# Altium PCB USB_Hub_V2.PcbDoc
Units mil, origin at the board's own origin, x right, y up, seen from the top; angles counter-clockwise.
Board outline 2638 x 2204.72 mil, 2 copper layers (Top Layer, Bottom Layer); 20 components, 19 nets, 83 pads, 99 vias.
Unrouted connection lines stored in the file: 2.
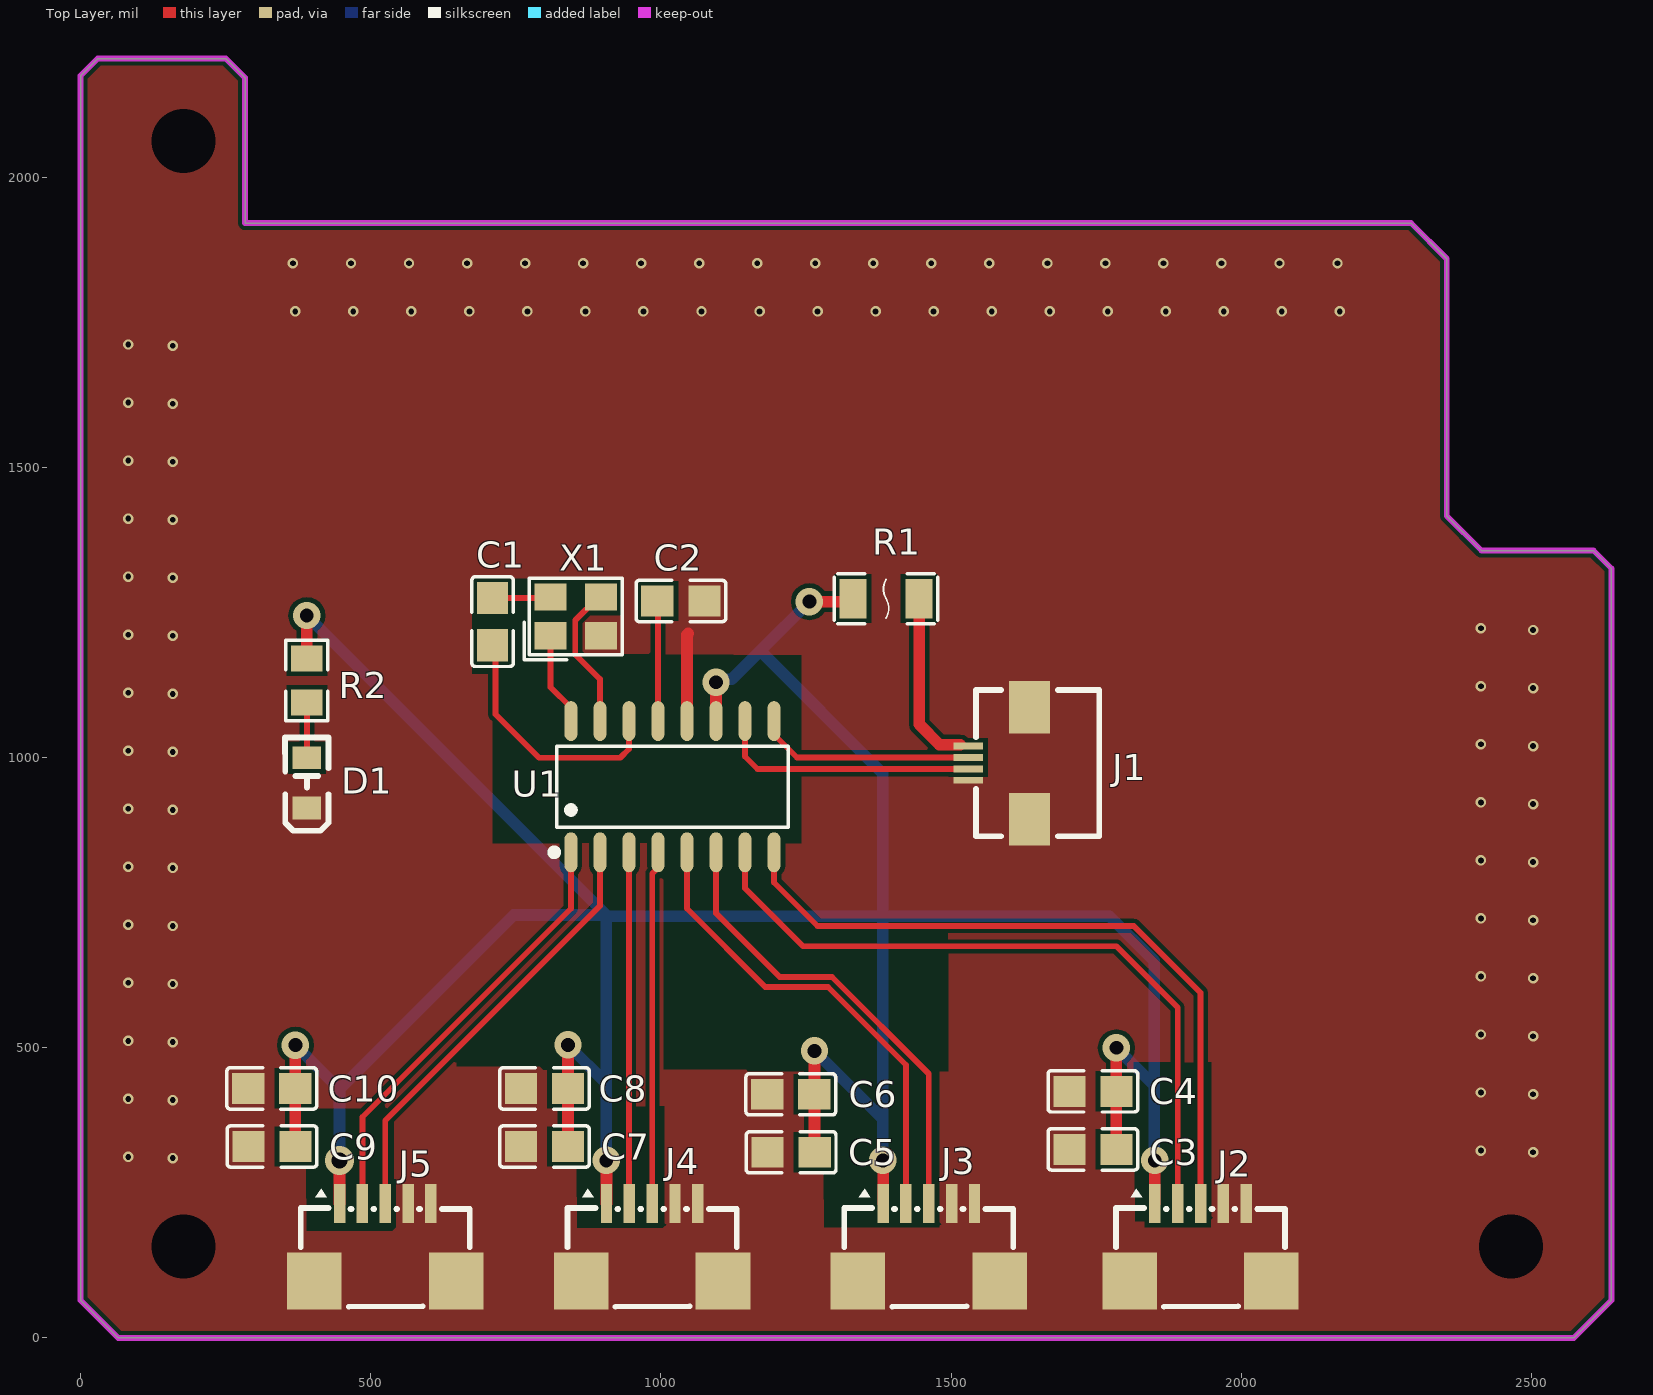
[diagram p0: Top Layer view]
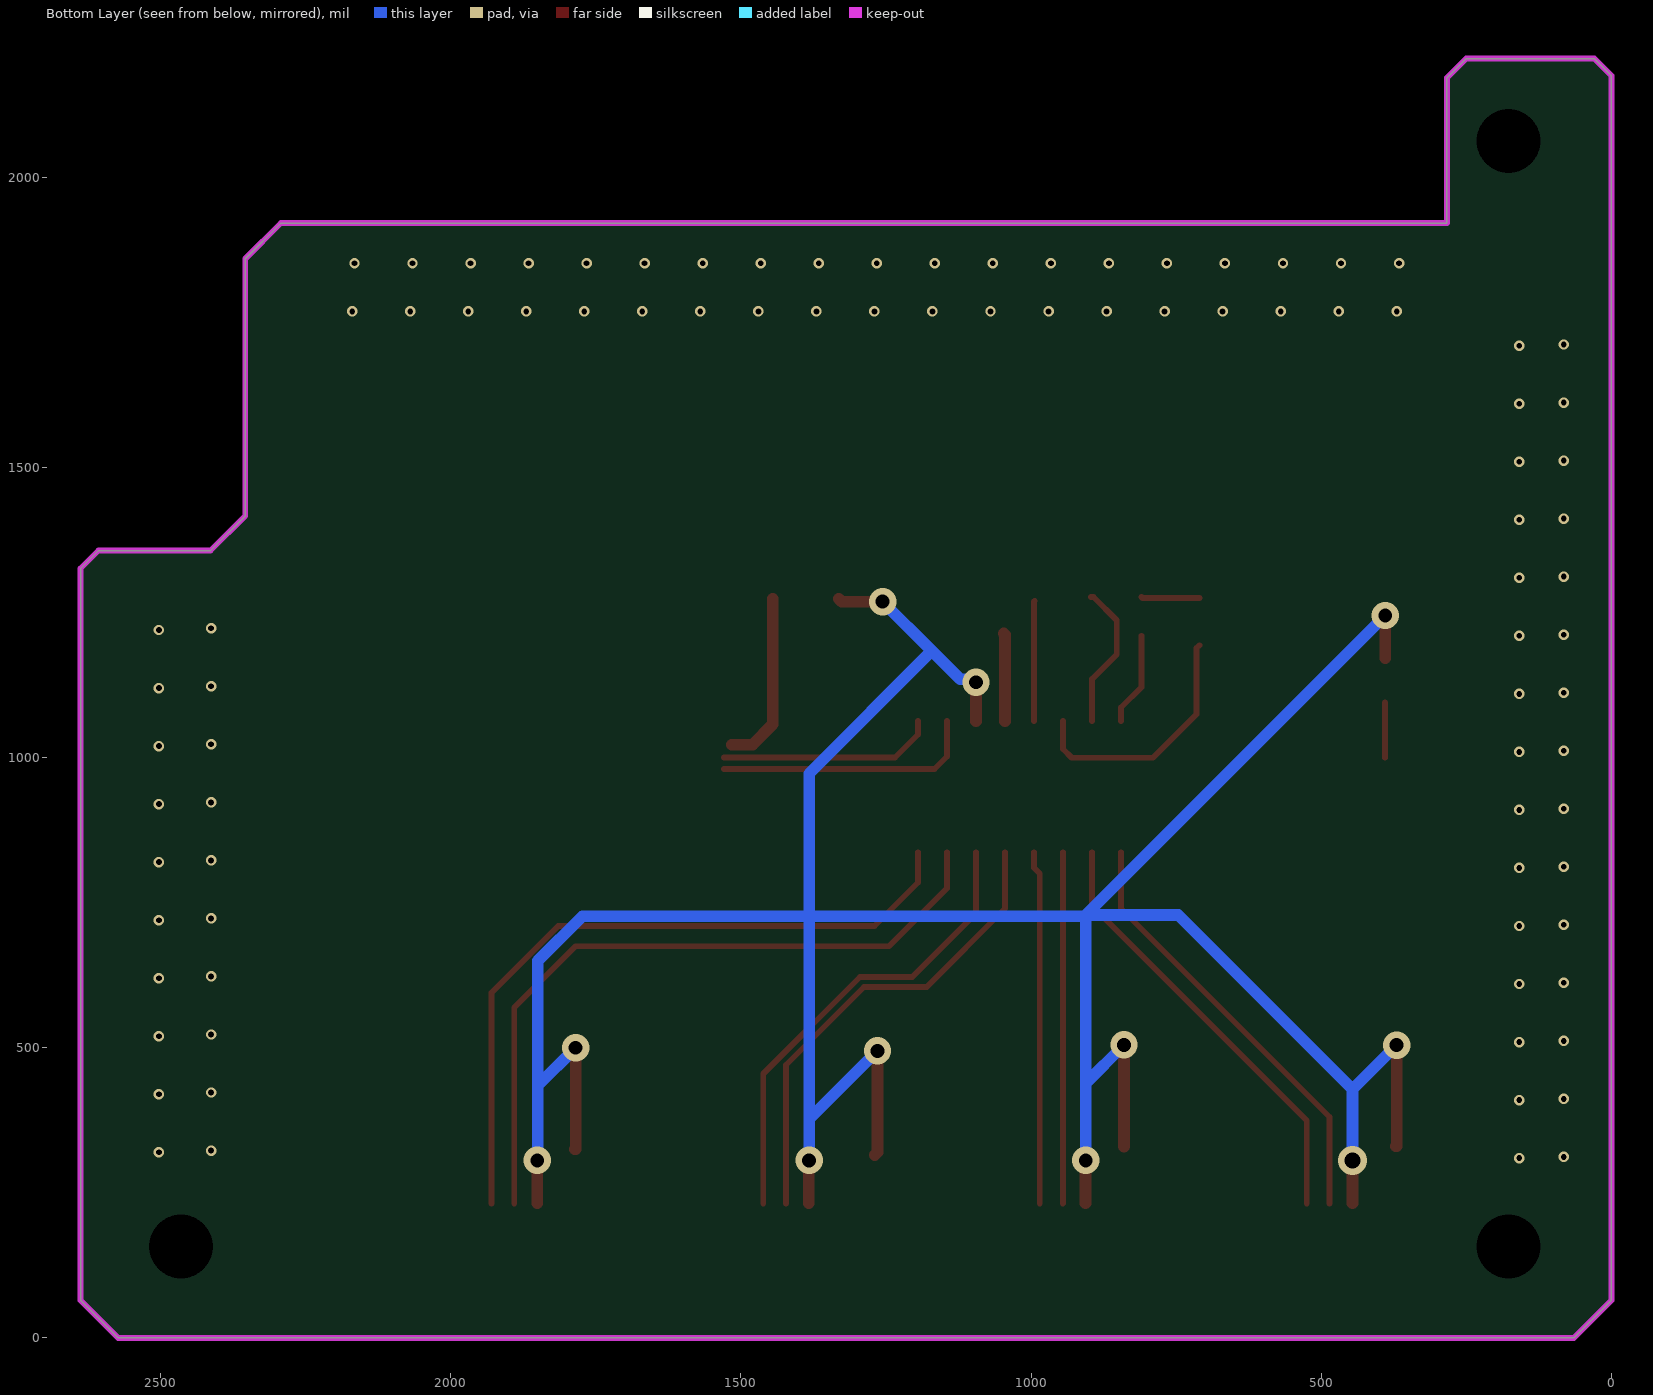
[diagram p1: Bottom Layer view, seen from below]

## Layer stack, top to bottom
Top Solder: solder mask 0.4, Solder Resist, Dk 3.5
Top Layer: signal copper 1.4
Dielectric 1: dielectric 12.6, FR-4, Dk 4.8
Bottom Layer: signal copper 1.4
Bottom Solder: solder mask 0.4, Solder Resist, Dk 3.5

## Board outline
0,65 0,2175 29.72,2204.72 250.28,2204.72 283.46,2171.54 283.46,1921.26 2292.74,1921.26 2354.33,1859.67 2354.33,1416.67 2414,1357 2607,1357 2638,1326 2638,64.89 2637.8,64.69 2573.11,0 65,0

## Design rules (kind name [scope] priority, off if disabled: settings)
Clearance [All] p1: gap=7.87 ignorepadtopadclearanceinfootprint=FALSE except(0: Arc-Hole Track-Hole SMDPad-Hole THPad-Hole Via-Hole Fill-Hole Poly-Hole Region-Hole Text-Hole; 3.94: Arc-SMDPad Track-SMDPad SMDPad-SMDPad; 7.09: Arc-Arc Arc-Track Arc-THPad Arc-Via Arc-Fill Arc-Poly Arc-Region Arc-Text Track-Track Track-THPad Track-Via Track-Fill Track-Poly Track-Region Track-Text; 19.68: THPad-Via Via-Via)
HoleSize [All] p1: absolutevalues=TRUE maxlimit=125.98 minlimit=1 maxpercent=80.000 minpercent=20.000
HoleToHoleClearance [All] p1: gap=12 allowstackedmicrovias=TRUE
MinimumSolderMaskSliver [All] p1: minsoldermaskwidth=2
PasteMaskExpansion [All] p1: expansion=1.97
PlaneClearance [All] p1: clearance=10
PlaneConnect [All] p1: planeconnectstyle=Direct reliefexpansion=20 reliefentries=4 reliefconductorwidth=10 reliefairgap=10
PolygonConnect [All] p1: connectstyle=Direct reliefconductorwidth=10 reliefentries=4 polygonreliefangle="90 Angle" airgapwidth=10
RoutingVias [All] p1: holewidth=11.81 width=15.75 viastyle="Through Hole" minholewidth=11.81 minwidth=15.75 maxholewidth=11.81 maxwidth=15.75
SilkToSilkClearance [All] p1: silktosilkclearance=1
SilkToSolderMaskClearance [IsPad] p1: minsilkscreentomaskgap=2 clearancetoexposedcopper=TRUE
SolderMaskExpansion [All] p1: expansion=3.94 istentingtop=FALSE
UnRoutedNet [All] p1: checkbadconnections=TRUE
Width PWR_idth [InNetClass('PWR')] p1: maxlimit=20 minlimit=12 preferedwidth=20 minimp=50.000000 maximp=50.000000 favimp=50.000000
Width [All] p2: maxlimit=10 minlimit=10 preferedwidth=10
21 further rules are at their usual default settings.

## Classes and differential pairs
net class PWR: GND "VBUS 5V" "VCC 5V"

## Components (designator, comment, footprint, x,y, rotation, side; value= is the part's Value field where it differs from the comment)
C1 "CAP0805" C0805 710,1234.45 r90 top locked
C2 "CAP0805" C0805 1034.45,1270 r0 top locked
C3 "CAP0805" C0805 1744.45,325 r0 top locked
C4 "CAP0805" C0805 1744.45,425 r0 top locked
C5 "CAP0805" C0805 1224.45,320 r0 top locked
C6 "CAP0805" C0805 1223.9,420 r0 top locked
C7 "CAP0805" C0805 799.45,330 r0 top locked
C8 "CAP0805" C0805 799.45,430 r0 top locked
C9 "CAP0805" C0805 330,330 r0 top locked
C10 "CAP0805" C0805 329.45,430 r0 top locked
D1 "LED0805-RD" LED0805-RD 390,956.69 r90 top locked
J1 "AFC01-S04FCC-00" FFC-SMD_4P-P0.50_AFC01-S04FCC-00 1582.24,990.55 r90 top
J2 "WAFER-SH1.0-5PWB" CONN-SMD_5P-P1.00_XUNPU_WAFER-SH1.0-5PWB 1930,165 r0 top locked
J3 "WAFER-SH1.0-5PWB" CONN-SMD_5P-P1.00_XUNPU_WAFER-SH1.0-5PWB 1461.67,165 r0 top locked
J4 "WAFER-SH1.0-5PWB" CONN-SMD_5P-P1.00_XUNPU_WAFER-SH1.0-5PWB 985,165 r0 top locked
J5 "WAFER-SH1.0-5PWB" CONN-SMD_5P-P1.00_XUNPU_WAFER-SH1.0-5PWB 525,165 r0 top locked
R1 "TLC F1206" F1206 1388.1,1274 r180 top
R2 "RES0805" R0805 390,1133.04 r90 top locked
U1 "SL2.1A" SOP-16_L10.0-W3.9-P1.27-LS6.0-BL 1020,950 r0 top locked
X1 "OSC CRYSTAL-SMD_4P-L3.2-W2.5-BL" CRYSTAL-SMD_4P-L3.2-W2.5-BL 853.31,1243.46 r0 top locked

## Footprints (in the part's own frame and the unit in brackets; to place one, negate y for a bottom-side part, rotate by r counter-clockwise, add the part's x,y. Pads: shape width x height; smd on the part's side, far side on the other; paste and mask are expansions set on the pad)
C0805 [mm]
  rect 1.41x1.35 smd paste-100 mask+0.051: 1(-1.03,0) 2(1.03,0)
  silkscreen extent -1.96,-0.9 1.96,0.9
CONN-SMD_5P-P1.00_XUNPU_WAFER-SH1.0-5PWB [mm]
  rect 0.5x1.7 smd paste+0 mask+0.05: 1(-2,1.7) 2(-1,1.7) 3(0,1.7) 4(1,1.7) 5(2,1.7)
  rect 2.388x2.5 smd paste+0 mask+0.05: 6(3.1,-1.7) 7(-3.1,-1.7)
  silkscreen extent -3.7,-2.82 3.7,2.34
CRYSTAL-SMD_4P-L3.2-W2.5-BL [mm]
  rect 1.4x1.2 smd paste+0 mask+0.051: 1(-1.1,-0.85) 2(1.1,-0.85) 3(1.1,0.85) 4(-1.1,0.85)
  silkscreen extent -2.26,-1.91 2.03,1.68
F1206 [mil]
  rect 46.9x68 smd paste+0 mask+2: 1(-56.9,0) 2(56.9,0)
  silkscreen extent -89,-43 89,43
FFC-SMD_4P-P0.50_AFC01-S04FCC-00 [mm]
  rect 0.3x1.3 smd paste+0 mask+0.05: 1(-0.75,1.34) 2(-0.25,1.34) 3(0.25,1.34) 4(0.75,1.34)
  rect 2.3x1.8 smd: 5(2.45,-1.34) 6(-2.45,-1.34)
  silkscreen extent -3.2,-4.4 3.2,1
LED0805-RD [mm]
  rect 1x1.25 smd paste+0 mask+0.051: 1(-1.1,0) 2(1.1,0)
  silkscreen extent -2.1,-0.95 1.98,0.96
R0805 [mil]
  rect 44.59x54.21 smd paste-3937.01 mask+2: 1(-38.04,0) 2(38.04,0)
  silkscreen extent -69,-36 69,36
SOP-16_L10.0-W3.9-P1.27-LS6.0-BL [mm]
  oval 0.56x1.745 smd paste+0 mask+0.051: 1(-4.445,-2.872) 2(-3.175,-2.872) 3(-1.905,-2.872) 4(-0.635,-2.872) 5(0.635,-2.872) 6(1.905,-2.872) 7(3.175,-2.872) 8(4.445,-2.872) 9(4.445,2.872) 10(3.175,2.872) 11(1.905,2.872) 12(0.635,2.872) 13(-0.635,2.872) 14(-1.905,2.872) 15(-3.175,2.872) 16(-4.445,2.872)
  silkscreen extent -5.33,-3.02 5.08,1.77

## Part data
C1 C2 C3 C4 C5 C6 C7 C8 C9 C10: "0805贴片电容", JLCPCB Part Class="Extended Part", LCSC Part Name="100nF ±10% 50V", Manufacturer=SAMSUNG(三星), Manufacturer Part=CL21B104KBCNNNC, Temperature Coefficient=X7R, Tolerance=±10%, Voltage Rated=50V, Add into BOM=yes, Convert to PCB=yes, Datasheet=https://atta.szlcsc.com/upload/public/pdf/source/20160103/1457707693305.pdf, Device=CL21B104KBCNNNC, Supplier=LCSC, Supplier Footprint=0805, Supplier Part=C1711, Symbol=CL21B104KBCNNNC
D1: "蓝光LED", Color Temperature=-, Forward Current=20mA, Forward Voltage (VF)=3.3V, JLCPCB Part Class="Extended Part", LCSC Part Name=LED贴片0805超高亮蓝光, Lens Color=无色透明, Manufacturer=MEIHUA(美华科技), Manufacturer Part=MHT170UBCT, Operating Temperature=-40~+85, Power Dissipation=95mW, Add into BOM=yes, Convert to PCB=yes, Datasheet=https://atta.szlcsc.com/upload/public/pdf/source/20190515/C389525_9DDE5770D44EFFE682D3E1E38A61D6F4.pdf, Device=MHT170UBCT, Diode Configuration=-, Dominant Wavelength=460nm~475nm, Luminous Flux (@25℃)=-, Luminous Intensity=225mcd, Mounting Sytle=-, Peak Wavelength=468nm, Supplier=LCSC, Supplier Footprint=0805, Supplier Part=C389525, Symbol=MHT170UBCT, Viewing Angle=140°
J1: library part "FPC AFC01-S04FCC-00", "4pin FPC接口", JLCPCB Part Class="Extended Part", LCSC Part Name="间距:0.5mm P数:4P 翻盖式 下接", Manufacturer=JS(钜硕电子), Add into BOM=yes, Contact Type=下接, Convert to PCB=yes, Datasheet=https://atta.szlcsc.com/upload/public/pdf/source/20190816/C413942_2A72D1AC756EAE17EEDF756A339D4500.pdf, Device=AFC01-S04FCC-00, FFC, FCB Thickness=0.3mm, Height Above Board=2mm, Locking Feature=翻盖式, Manufacturer Part=AFC01-S04FCC-00, Mounting Type=卧贴, Number of Contacts=4P, Pitch=0.5mm, Supplier=LCSC, Supplier Footprint=SMD,P=0.5mm,卧贴, Supplier Part=C262260, Symbol=AFC01-S04FCC-00
J2 J3 J4 J5: library part SH1.0-5pin, "SH1.0 5pin 母头端子", Current Rating (Max)=1A, JLCPCB Part Class="Extended Part", LCSC Part Name="1x5P 间距:1mm 卧贴", Manufacturer=XUNPU(讯普), Operating Temperature Range=-25℃~+85℃, Add into BOM=yes, Convert to PCB=yes, Datasheet=https://atta.szlcsc.com/upload/public/pdf/source/20220527/1879B8210BD3B2006BCEAC1A40D397B6.pdf, Device=WAFER-SH1.0-5PWB, Manufacturer Part=WAFER-SH1.0-5PWB, Mounting Style=卧贴, Number of Pins=5P, Number of PINs Per Row=5, Number of Rows=1, Pins Structure=1x5P, Pitch=1mm, Supplier=LCSC, Supplier Footprint=SMD,P=1mm,卧贴, Supplier Part=C3029344, Symbol=WAFER-SH1.0-5PWB
R1: "保险丝", Current Rating (Max)=100A, Hold Current=1A, JLCPCB Part Class="Extended Part", LCSC Part Name="6V 1A 自恢复", Manufacturer=TLC(竞沃), Manufacturer Part=TLC-NSMD100, Operating Temperature=-40~+85, Operating Voltage (Max)=6V, Power Dissipation=600mW, Resistance - Initial (Ri) (Min)=-, Trip Current=2A, Add into BOM=yes, Convert to PCB=yes, Datasheet=https://atta.szlcsc.com/upload/public/pdf/source/20180802/C261954_CE31CE21EEB143DB51778C363DF0F083.pdf, Device=TLC-NSMD100, Maximum Time to Trip=100ms, Resistance - Post Trip (R1) (Max)=-, Supplier=LCSC, Supplier Footprint=1206, Supplier Part=C261954, Symbol=TLC-NSMD100
R2: "0805贴片电阻", JLCPCB Part Class="Extended Part", LCSC Part Name="1kΩ ±5%", Manufacturer=FH(风华), Manufacturer Part=RS-05K102JT, Operating Temperature Range=-55~+155, Overload Voltage (Max)=150V, Power(Watts)=125mW, Temperature Coefficient=±100ppm/, Tolerance=±5%, Add into BOM=yes, Convert to PCB=yes, Datasheet=https://atta.szlcsc.com/upload/public/pdf/source/20170704/1499151304704.pdf, Device=RS-05K102JT, Supplier=LCSC, Supplier Footprint=0805, Supplier Part=C115302, Symbol=RS-05K102JT
U1: "USB 2.0接口4口HUB芯片", JLCPCB Part Class="Extended Part", Manufacturer=CoreChips(和芯润德), Supply Voltage=-, Add into BOM=yes, Convert to PCB=yes, Data Rate=-, Datasheet=https://atta.szlcsc.com/upload/public/pdf/source/20180522/C192893_624110D24898D57AAC785E3DF98EA862.pdf, Device=SL2.1A, LCSC Part Name=SL2.1A, Manufacturer Part=SL2.1A, Number of Drivers/Receivers=-, Protocol=-, Supplier=LCSC, Supplier Footprint=SOP-16_150mil, Supplier Part=C192893, Symbol=SL2.1A, Type=-
X1: "晶振", Equivalent Series Resistance (ESR)=80Ω, Frequency Stability=-, Frequency Tolerance=±10ppm, JLCPCB Part Class="Extended Part", LCSC Part Name="12MHz ±10ppm 20pF", Load Capacitance=20pF, Manufacturer=JGHC(晶光华), Manufacturer Part=S3212000201080, Operating Temperature=-40~+85, Add into BOM=yes, Convert to PCB=yes, Crystal Type=贴片无源晶振, Datasheet=https://atta.szlcsc.com/upload/public/pdf/source/20191012/C426972_E2C41F8C78BF72E52773F7737EA32F83.pdf, Device=S3212000201080, Supplier=LCSC, Supplier Footprint=SMD3225-4P, Supplier Part=C426972, Symbol=S3212000201080

## Free pads (board coordinates)
  round 60 hole 110.24 mask+35.43: 7(177.17,157.48) 7(177.17,2062.99) 7(2464.57,157.48)

## Via types
v1: diameter 18, hole 10, Top Layer to Bottom Layer, 88 vias
v2: diameter 47.24, hole 23.62, Top Layer to Bottom Layer, 10 vias
v3: diameter 50, hole 28, Top Layer to Bottom Layer, 1 vias

## Nets (pads, with @x,y where several pads share a name; then routed paths per layer and width w, separated by ;. In a path a pad name is that pad's centre, name@x,y a point inside that pad or via, vN(x,y) a via of type N, cw(c..) or ccw(c..) an arc to the next point about the centre after c; other vN are vias at no path point)
DM: J1.3 U1.9 | length 374.1
  Top Layer w10: U1.9 1195,1039.76 1234.37,1000.39 J1.3
DM1: J2.2 U1.7 | length 1230.2
  Top Layer w10: U1.7 1145,775 1245,675 1785,675 1890.63,569.37 J2.2
DM2: J3.2 U1.5 | length 824.5
  Top Layer w10: U1.5 1045,740 1180,605 1287.92,605 1422.3,470.63 J3.2
DM3: J4.2 U1.3 | length 631.8
  Top Layer w10: U1.3@945,810.32 U1.3 945.32,836.59 945.32,232.24 J4.2
DM4: J5.2 U1.1 | length 753.8
  Top Layer w10: J5.2 485.63,380.63 845,740 U1.1
DP: J1.2 U1.10 | length 454.4
  Top Layer w10: U1.10 1145,1002 1166.3,980.7 J1.2
DP1: J2.3 U1.8 | length 1228.7
  Top Layer w10: U1.8 1195,785 1270,710 1815,710 1930,595 J2.3
DP2: J3.3 U1.6 | length 809.6
  Top Layer w10: U1.6 1095,731.98 1204.9,622.09 1295,622.09 1461.67,455.42 J3.3
DP3: J4.3 U1.4 | length 609.1
  Top Layer w10: J4.3 985,800.32 995,810.32 U1.4
DP4: J5.3 U1.2 | length 758.2
  Top Layer w10: J5.3 525,375 895,745 U1.2
GND: C2.2 C3.1 C4.1 C5.1 C6.1 C7.1 C8.1 C9.1 C10.1 D1.1 J1.1 J1.5 J1.6 J2.4 J2.5 J2.6 J2.7 J3.4 J3.5 J3.6 J3.7 J4.4 J4.5 J4.6 J4.7 J5.4 J5.5 J5.6 J5.7 pad.7 U1.12 X1.2 | length 151.7
  Top Layer w20: U1.12 1045,1212 1047,1214
  other v1: 159,310 82,312 2503,320 2413,323 159,410 82,412 2503,420 2413,423 159,510 82,512 2503,520 2413,523 159,610 82,612 2503,620 2413,623 159,710 82,712 2503,720 2413,723 159,810 82,812 2503,820 2413,823 159,910 82,912 2503,920 2413,923 159,1010 82,1012 2503,1020 2413,1023 159,1110 82,1112 2503,1120 2413,1123 159,1210 82,1212 2503,1220 2413,1223 159,1310 82,1312 159,1410 82,1412 159,1510 82,1512 159,1610 82,1612 159,1710 82,1712 370,1769 470,1769 570,1769 670,1769 770,1769 870,1769 970,1769 1070,1769 1170,1769 1270,1769 1370,1769 1470,1769 1570,1769 1670,1769 1770,1769 1870,1769 1970,1769 2070,1769 2170,1769 366,1852 466,1852 566,1852 666,1852 766,1852 866,1852 966,1852 1066,1852 1166,1852 1266,1852 1366,1852 1466,1852 1566,1852 1666,1852 1766,1852 1866,1852 1966,1852 2066,1852 2166,1852
NetC1_1: C1.1 U1.14 | length 436.3
  Top Layer w10: C1.1 715,1188.9 715,1075 790,1000 930,1000 945,1015 U1.14
NetC1_2: C1.2 X1.4 | length 100.8
  Top Layer w10: C1.2 808.07,1275 X1.4
NetC2_1: C2.1 U1.13 | length 207.4
  Top Layer w10: C2.1 995,1268.9 U1.13
NetD1_2: D1.2 R2.1 | length 95
  Top Layer w10: D1.2 R2.1
NetU1_15: U1.15 X1.3 | length 252.1
  Top Layer w10: U1.15 895,1135.36 852.43,1177.93 852.43,1236.68 892.68,1276.93 X1.3
NetU1_16: U1.16 X1.1 | length 161.4
  Top Layer w10: X1.1 810,1121.42 845,1086.42 U1.16
"VBUS 5V": J1.4 R1.1 | length 302
  Top Layer w20: R1.1 1445,1057.48 1480,1022.48 J1.4@1516,1022.48
"VCC 5V": C3.2 C4.2 C5.2 C6.2 C7.2 C8.2 C9.2 C10.2 J2.1 J3.1 J4.1 J5.1 R1.2 R2.2 U1.11 | length 6046.2
  Top Layer w20: C10.2 C10.2@370.28,429.72 ; v2(370.28,504.72) C10.2@370.28,429.72 ; C9.2@371.46,330.27 370.28,330.27 C10.2@370.28,429.72 ; R2.2 v2(390,1245) ; J5.1 v3(446.26,305.74) ; C7.2 C8.2 v2(840,505) ; J4.1 v2@906.26,305.74 ; U1.11 v2(1095,1130) ; v2(1256,1269) 1326.2,1269 R1.2 ; C6.2 C6.2@1264.72,419.72 ; v2(1264.72,494.72) C6.2@1264.72,419.72 ; C5.2@1269.6,315.4 C5.2 1264.72,320.27 C6.2@1264.72,419.72 ; J3.1 v2@1382.93,305.74 ; v2(1785,500) C4.2 C3.2 C3.2@1786.18,325 ; J2.1 v2@1851.26,305.74
  Bottom Layer w20: v2(370.28,504.72) 446.26,428.74 ; v2(390,1245) 906,729 ; v3(446.26,305.74) 446.26,428.74 ; v2(840,505) 906,439 ; v2(906,306) 906,439 ; v2(1095,1130) 1100.21,1135.21 1122.21,1135.21 1171,1184 ; v2(1256,1269) 1171,1184 ; v2(1264.72,494.72) 1382.67,376.78 ; v2(1382.67,306) 1382.67,376.78 ; v2(1785,500) 1850,435 ; v2(1851,306) 1850,307 1850,435 ; 446.26,428.74 746.52,729 906,729 ; 906,439 906,727 ; 906,727 1382.67,727 ; 906,727 906,729 ; 1171,1184 1382.67,972.33 1382.67,727 ; 1382.67,376.78 1382.67,727 ; 1382.67,727 1773,727 1850,650 1850,435

## Polygon pours and split planes (outlines as drawn)
GND on Top Layer "GND_L01_P000" (solid, pour order 0): 0,65 0,2175 29.72,2204.72 250.28,2204.72 283.46,2171.54 283.46,1921.26 2292.74,1921.26 2354.33,1859.67 2354.33,1416.67 2414,1357 2607,1357 2638,1326 2638,64.89 2637.8,64.69 2573.11,0 65,0

## Keep-outs
Keep-Out Layer:
  lines w10: 2637.8,64.69 2573.11,0 65,0 0,65 0,2175 29.72,2204.72 250.28,2204.72 283.46,2171.54 283.46,1921.26 2292.74,1921.26 2354.33,1859.67 2354.33,1416.67 2414,1357 2607,1357 2638,1326 2638,64.89

## Other copper
Top Layer:
  pour cut-out: 1814.47,475.43 1948.25,475.43 1948.25,209.59 1950.97,206.87 1945.38,201.28 1817.47,201.28
  pour cut-out: 1164.27,852.52 1175.73,852.52 1175.73,780.31 1241.04,715 1222.43,715 1157.32,780.1
  pour cut-out: 710,1180.28 710,852.52 1242,852.52 1242,1176.16
  pour cut-out: 744.45,1310.63 746.65,1308.43 774.57,1308.43 774.57,1296.15 744.45,1296.15
  pour cut-out: 1150,460 1147,463 1005,463 1005,852 1004,853 1151,853
  pour cut-out: 814,466 812,468 648,468 648,484 910,746 909,747 909,856 928,856 929,857 930,856 930,394 875,394 872,397 872,462 797,462 791,468
  pour cut-out: 835,1307.5 867.5,1307.5 867.5,1260 840,1260
  pour cut-out: 675,1255 785,1255 785,1153.88 788.85,1150.03 783.81,1145 675,1145
  pour cut-out: 1145,715 1150,710 1150,460 1495,460 1495,715
  pour cut-out: 1278.58,465 1480,465 1480,199.15 1482.72,196.43 1477.13,190.85 1281.58,190.85
  pour cut-out: 853.85,400.27 854.4,399.72 1006.15,399.72 1006.15,198.03 1008.87,195.31 1003.28,189.72 856.15,189.72
  pour cut-out: 387.7,395.55 388.25,395 540,395 540,193.3 542.72,190.59 537.13,185 390,185

## Silkscreen, mask and mechanical layers (free items; w line width, h text height)
Top Solder:
  drawing of 9 lines, arcs and shapes, not listed